# EAGLE board HW2schematic (EAGLE 8.1.0)
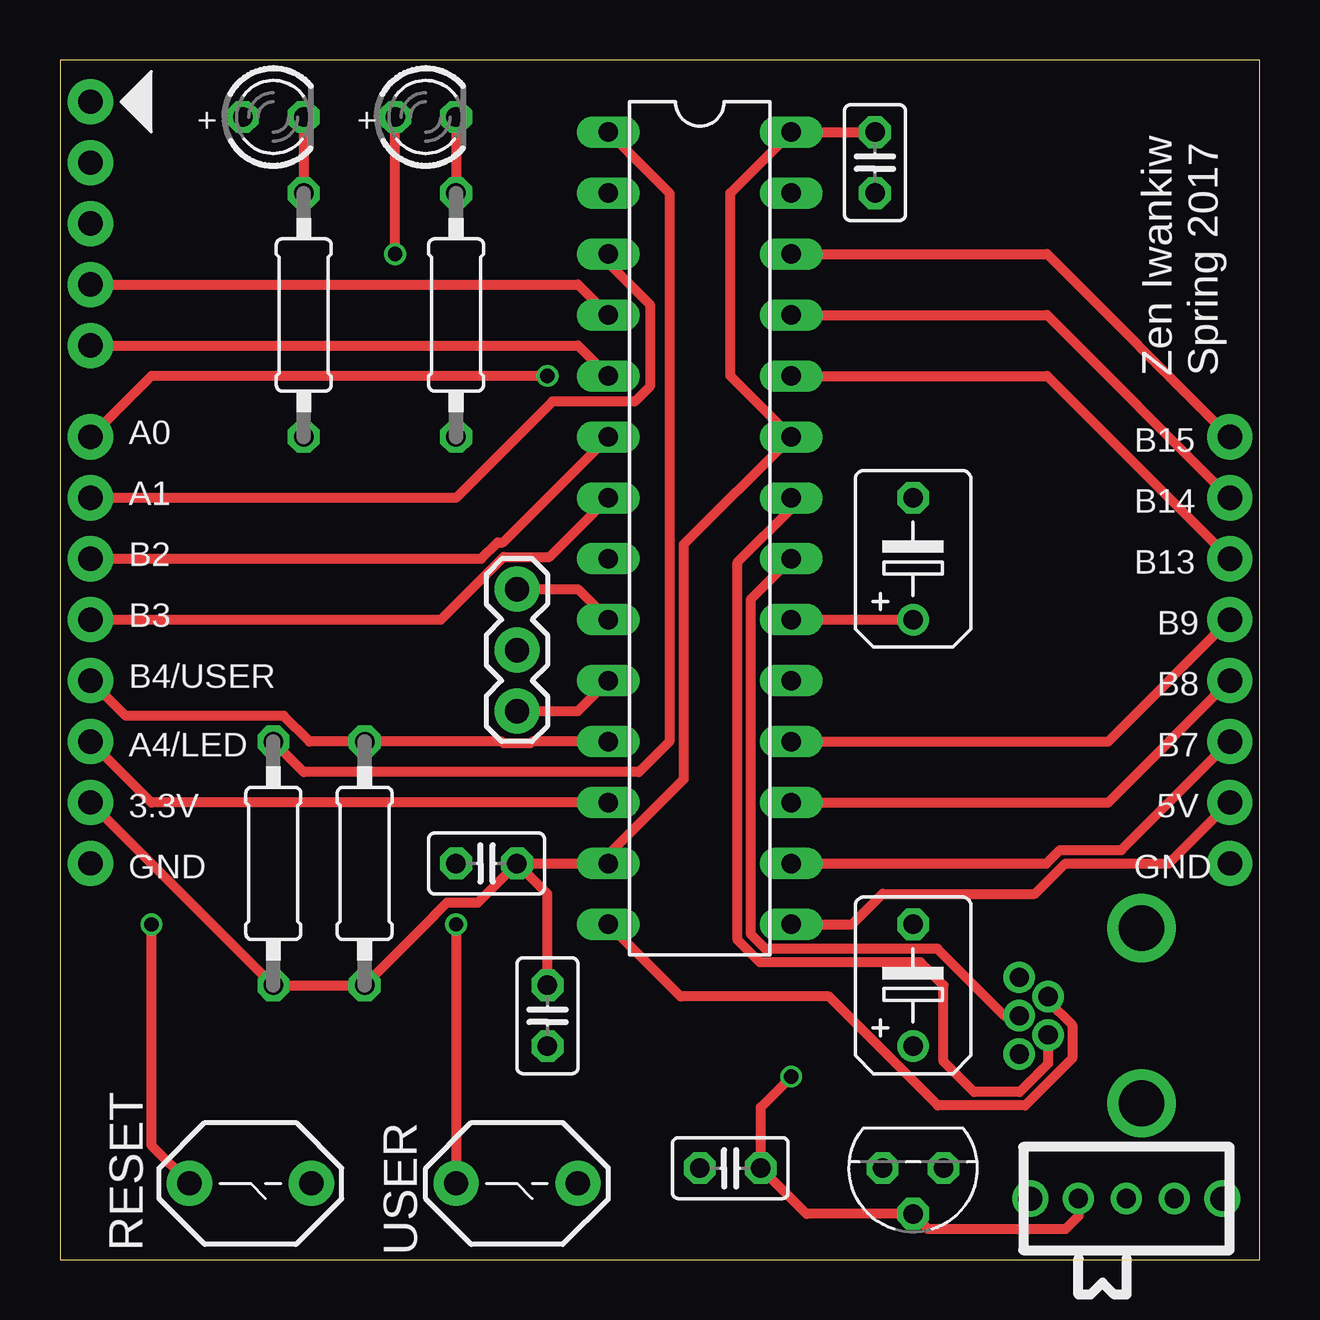
[diagram p0: board, top side]
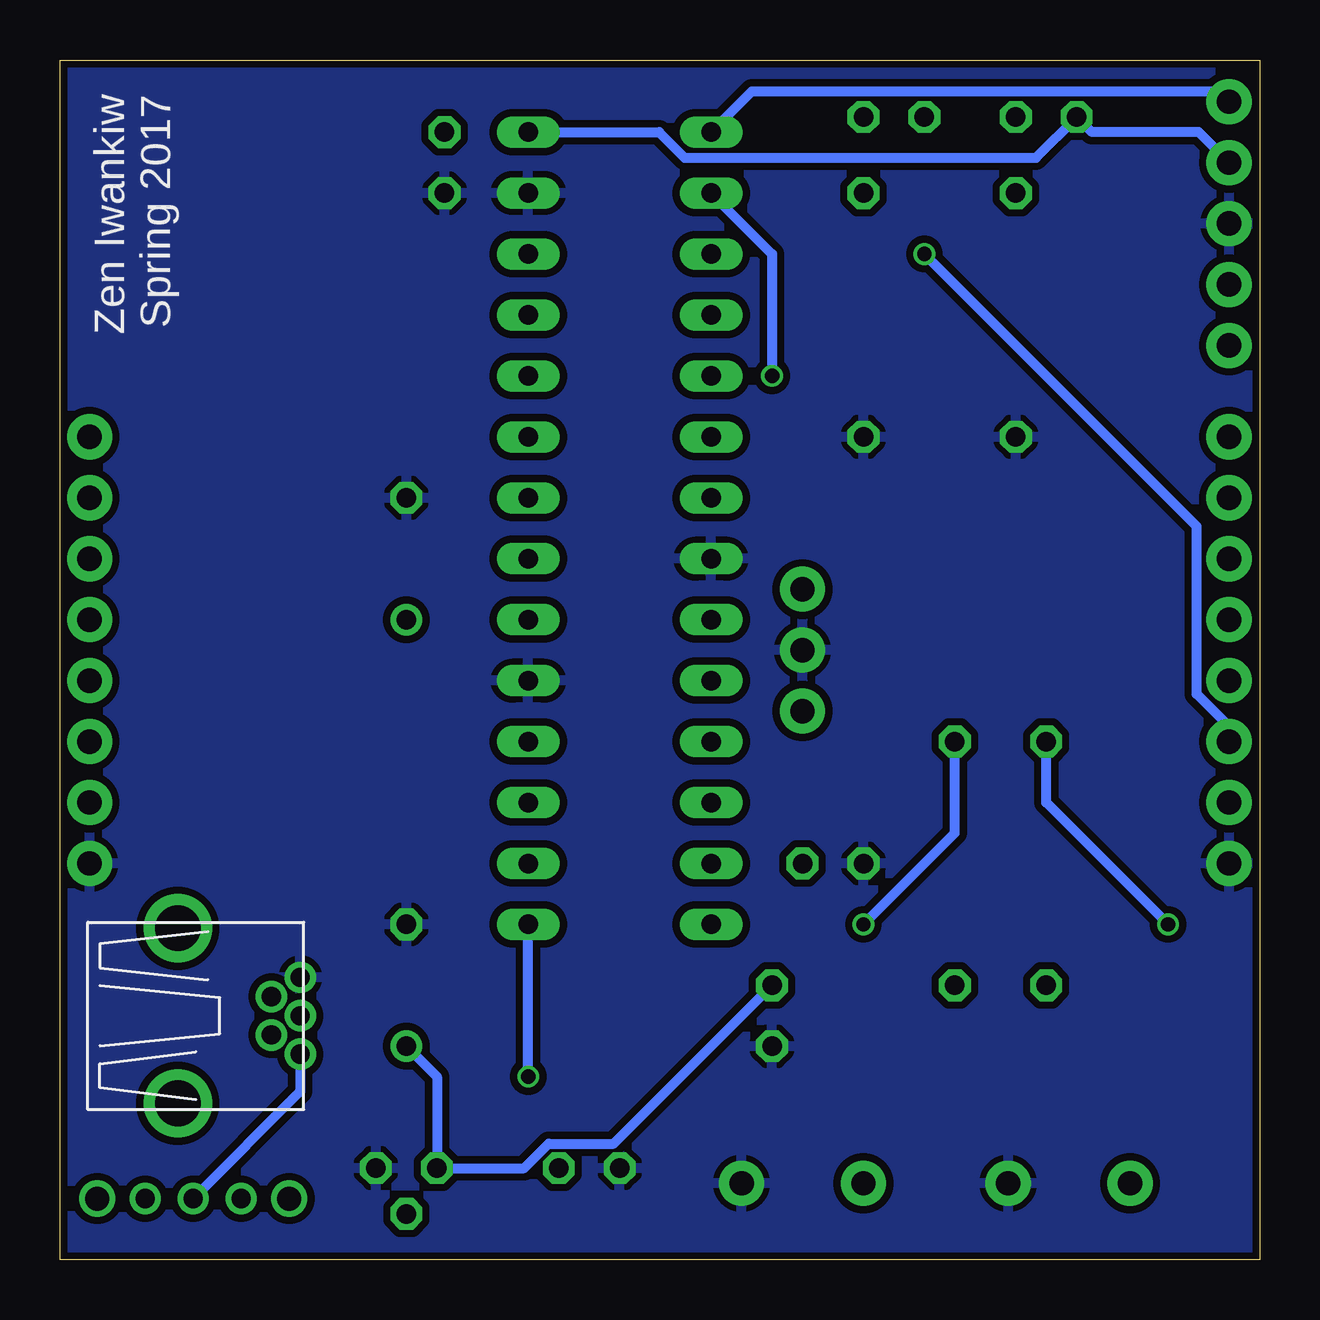
[diagram p1: board, bottom side, seen from below]

Size 50 x 50 mm. Coordinates in mm from the lower left corner, seen from the top.
Outline: 0,0 50,0 50,50 0,50 0,0
Copper layers (1*16): Top 0.035mm / dielectric 1.5mm / Bottom 0.035mm
Design rules "SeeedStudio_2layer_DRU_no_angle_20140221": minimum track width 6mil, minimum drill 12mil, track to track 6mil, track to pad 6mil, pad to pad 6mil, via to via 6mil, smd to smd 0mil, copper to edge 10mil, drill to drill 10mil, minimum pad ring 10mil, minimum via ring 6mil, stop-mask expansion 2mil, vias tented up to drill 100mil, thermal gap 10mil

## Footprints (pad centres in the part's own frame; a part is rotated, then mirrored left to right if it is on the bottom)
B45181B = drill 0.813: + -2.54,0 | drill 0.813 octagon: - 2.54,0
C025-025X050 = drill 0.813 octagon: 1 -1.27,0; 2 1.27,0
1X08_NO_SILK = drill 1.016 pad 1.88: 1 0,0; 2 2.54,0; 3 5.08,0; 4 7.62,0; 5 10.16,0; 6 12.7,0; 7 15.24,0; 8 17.78,0
USB-MB-H = drill 0.8: D+ 5.1,0; D- 3.9,0.8; GND 5.1,-1.6; ID 3.9,-0.8; VBUS 5.1,1.6 | drill 1.9: P$6 0,-3.65; P$7 0,3.65
LED3MM = drill 0.813 octagon: A -1.27,0; K 1.27,0
0207/10 = drill 0.813 octagon: 1 -5.08,0; 2 5.08,0
BUTTON = drill 1.016 pad 1.88: 1 -2.54,0; 2 2.54,0
DIL28-3 = drill 0.813 long: 1 -16.51,-3.81; 2 -13.97,-3.81; 3 -11.43,-3.81; 4 -8.89,-3.81; 5 -6.35,-3.81; 6 -3.81,-3.81; 7 -1.27,-3.81; 8 1.27,-3.81; 9 3.81,-3.81; 10 6.35,-3.81; 11 8.89,-3.81; 12 11.43,-3.81; 13 13.97,-3.81; 14 16.51,-3.81; 15 16.51,3.81; 16 13.97,3.81; 17 11.43,3.81; 18 8.89,3.81; 19 6.35,3.81; 20 3.81,3.81; 21 1.27,3.81; 22 -1.27,3.81; 23 -3.81,3.81; 24 -6.35,3.81; 25 -8.89,3.81; 26 -11.43,3.81; 27 -13.97,3.81; 28 -16.51,3.81
SLIDESWITCH = drill 0.8: 1 -2,0; 2 0,0; 3 2,0 | drill 1: P$1 -4,0; P$2 4,0
1X03 = drill 1.016 pad 1.88: 1 0,0; 2 2.54,0; 3 5.08,0
TO92 = drill 0.813 octagon: 1 -1.27,0; 2 0,1.905; 3 1.27,0
PICKIT = drill 1.016 pad 1.88: 1 -5.08,0; 2 -2.54,0; 3 0,0; 4 2.54,0; 5 5.08,0

## Placement (x,y rotation side)
C1  10uF  [B45181B]  35.56,11.43 90 top
C2  0.1uF  [C025-025X050]  27.94,3.81 180 top
C3  0.1uF  [C025-025X050]  20.32,10.16 270 top
C4  10uF  [B45181B]  35.56,29.21 90 top
C5  0.1uF  [C025-025X050]  17.78,16.51 180 top
C6  0.1uF  [C025-025X050]  33.97,45.72 270 top
J1  [1X08_NO_SILK]  1.27,16.51 90 top
J2  [1X08_NO_SILK]  48.77,16.51 90 top
J3  USB-MB-H  [USB-MB-H]  45.09,10.16 180 top
LED1  POWER  [LED3MM]  8.89,47.62 0 top
LED2  USER  [LED3MM]  15.24,47.62 0 top
R1  330  [0207/10]  10.16,39.37 90 top
R2  10k  [0207/10]  8.89,16.51 270 top
R3  10k  [0207/10]  12.7,16.51 270 top
R4  330  [0207/10]  16.51,39.37 90 top
RESET  BUTTON  [BUTTON]  7.94,3.17 180 top
U$1  PIC32  [DIL28-3]  26.67,30.48 270 top
U$2  SLIDESWITCH  [SLIDESWITCH]  44.45,2.54 180 top
U$3  8MHZ_OSCILLATOR  [1X03]  19.05,27.94 270 top
U$4  MCP1702  [TO92]  35.56,3.81 180 top
U$5  PICKIT  [PICKIT]  1.27,43.18 270 top
USER  BUTTON  [BUTTON]  19.05,3.17 180 top

## Library data of the parts
C1-C6 J1-J3 LED1 LED2 R1-R4 RESET U$1-U$5 USER = HW2library

## Nets
+3V3: C1.+ C3.1 C5.1 C6.1 J1.2 LED1.A R2.2 R3.2 U$1.13 U$1.23 U$1.28 U$4.3 U$5.2
+5V: C2.1 J2.2 U$1.15 U$2.3 U$4.2
A0: J1.8 U$1.2
A1: J1.7 U$1.3
A4: J1.3 LED2.A U$1.12
B2: J1.6 U$1.6
B3: J1.5 U$1.7
B4: J1.4 R3.1 U$1.11 USER.2
B7: J2.3 U$1.16
B8: J2.4 U$1.17
B9: J2.5 U$1.18
B13: J2.6 U$1.24
B14: J2.7 U$1.25
B15: J2.8 U$1.26
D+: J3.D+ U$1.21
D-: J3.D- U$1.22
GND: C1.- C2.2 C3.2 C4.- C5.2 C6.2 J1.1 J2.1 J3.GND R1.1 R4.1 RESET.1 U$1.8 U$1.19 U$1.27 U$3.2 U$4.1 U$5.3 USER.1
N$1: LED2.K R4.2
N$4: R2.1 RESET.2 U$1.1 U$5.1
N$5: C4.+ U$1.20
N$6: J3.VBUS U$2.2
N$7: U$1.9 U$3.1
N$8: LED1.K R1.2
N$9: U$1.10 U$3.3
PGC: U$1.5 U$5.5
PGD: U$1.4 U$5.4
USBID: J3.ID U$1.14

## Tracks (layer width: path | path; a pad name or v marks a point on that pad's centre or on a via)
+3V3
  Top 0.406: C6.1 U$1.28 27.94,44.45 27.94,36.83 U$1.23 26.01,29.82 26.01,20.03 22.86,16.88 U$1.13 C5.1 | J1.2 R2.2 R3.2 15.6,14.33 15.6,14.35 16.13,14.88 17.42,14.88 C5.1 | C3.1 20.32,15.24 C5.1
  Bottom 0.406: U$5.2 2.54,46.99 6.99,46.99 LED1.A 9.32,45.92 23.96,45.92 25.03,46.99 U$1.28 | C1.+ 34.29,7.62 U$4.3 30.65,3.81 29.63,4.83 26.92,4.83 C3.1
+5V  (via drill 0.6)
  Top 0.406: U$2.3 42.45,1.81 41.91,1.27 36.2,1.27 U$4.2 31.11,1.91 C2.1 29.21,6.35 v30.48,7.62 | U$1.15 33.02,13.97 34.29,15.24 40.64,15.24 41.91,16.51 46.23,16.51 J2.2
  Bottom 0.406: v30.48,7.62 U$1.15
A0  (via drill 0.6)
  Top 0.406: v20.32,36.83 3.81,36.83 J1.8
  Bottom 0.406: U$1.2 20.32,41.91 v20.32,36.83
A1
  Top 0.406: U$1.3 22.86,41.54 24.59,39.81 24.59,36.39 23.96,35.76 20.52,35.76 16.51,31.75 J1.7
A4  (via drill 0.6)
  Top 0.406: U$1.12 3.81,19.05 J1.3 | v13.97,41.91 LED2.A
  Bottom 0.406: 1.27,22.23 J1.3 1.27,22.23 | v13.97,41.91 2.62,30.56 2.62,23.57 1.27,22.23
B2
  Top 0.406: J1.6 17.55,29.21 18.24,29.9 18.47,29.9 U$1.6
B3
  Top 0.406: U$1.7 20.4,29.29 18.49,29.29 15.88,26.67 J1.5
B4  (via drill 0.6)
  Top 0.406: U$1.11 19.68,21.59 19.61,21.51 18.49,21.51 18.42,21.59 R3.1 10.4,21.59 9.33,22.66 2.74,22.66 J1.4 | v16.51,13.97 USER.2
  Bottom 0.406: v16.51,13.97 12.7,17.78 R3.1
B7
  Top 0.406: U$1.16 41.12,16.51 41.68,17.07 44.25,17.07 J2.3
B8
  Top 0.406: U$1.17 43.69,19.05 J2.4
B9
  Top 0.406: U$1.18 43.69,21.59 J2.5
B13
  Top 0.406: U$1.24 41.15,36.83 J2.6
B14
  Top 0.406: U$1.25 41.15,39.37 J2.7
B15
  Top 0.406: U$1.26 41.15,41.91 J2.8
D+
  Top 0.406: J3.D+ 39.37,10.16 36.58,12.95 29.4,12.95 28.8,13.55 28.8,27.53 U$1.21
D-
  Top 0.406: J3.D- 41.19,8.16 40.01,6.99 38.1,6.99 36.83,8.26 36.83,11.43 35.87,12.39 29.17,12.39 28.25,13.32 28.25,29.07 30.48,31.31 U$1.22
GND
  pour Bottom (isolate 0.305): 0,50.8 52.07,50.8 52.07,-1.27 -1.27,-1.27 -1.27,50.8
N$1
  Top 0.406: LED2.K R4.2
N$4  (via drill 0.6)
  Top 0.406: U$1.1 25.4,44.45 25.4,21.59 24.13,20.32 10.16,20.32 R2.1 | v3.81,13.97 3.81,4.76 RESET.2
  Bottom 0.406: U$1.1 21.16,48.69 1.7,48.69 U$5.1 | v3.81,13.97 8.89,19.05 R2.1
N$5
  Top 0.406: U$1.20 C4.+
N$6
  Bottom 0.406: J3.VBUS 39.98,7 U$2.2
N$7
  Top 0.406: U$3.1 21.59,27.94 U$1.9
N$8
  Top 0.406: LED1.K R1.2
N$9
  Top 0.406: U$3.3 21.59,22.86 U$1.10
PGC
  Top 0.406: U$5.5 21.59,38.1 U$1.5
PGD
  Top 0.406: U$5.4 21.59,40.64 U$1.4
USBID
  Top 0.406: U$1.14 25.87,10.96 32.05,10.96 36.59,6.43 40.24,6.43 42.2,8.38 42.2,9.78 41.19,10.79 J3.ID

## Text on the board
tPlace: + | + | Zen Iwankiw / Spring 2017 | A0 | B15 | A1 | B14 | B2 | B13 | B3 | B9 | B4/USER | B8 | A4/LED | B7 | 3.3V | 5V | GND | GND
bPlace: Zen Iwankiw / Spring 2017